# EAGLE board ovm7962 (EAGLE 8.5.0)
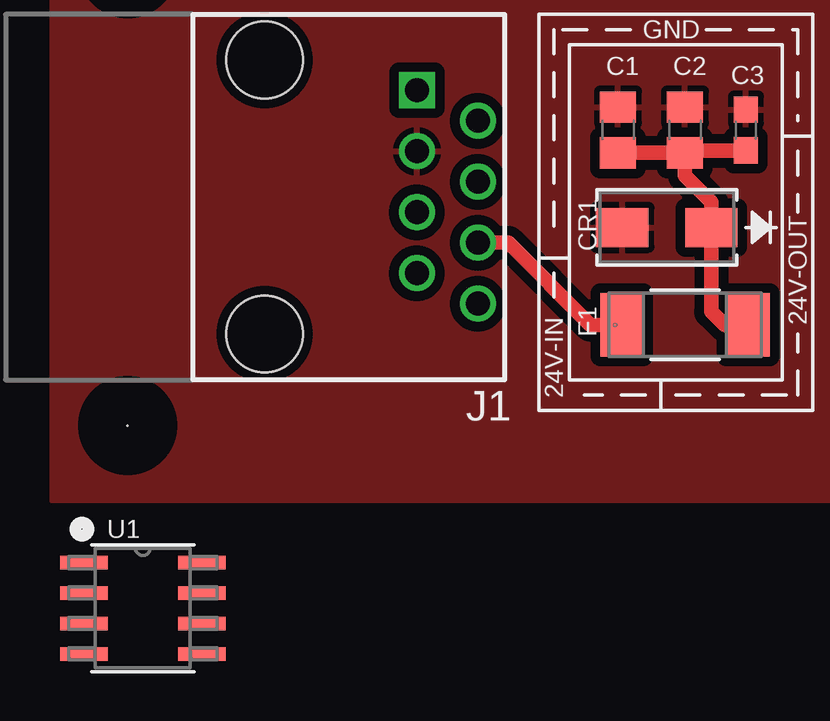
[diagram p0: board, top side]
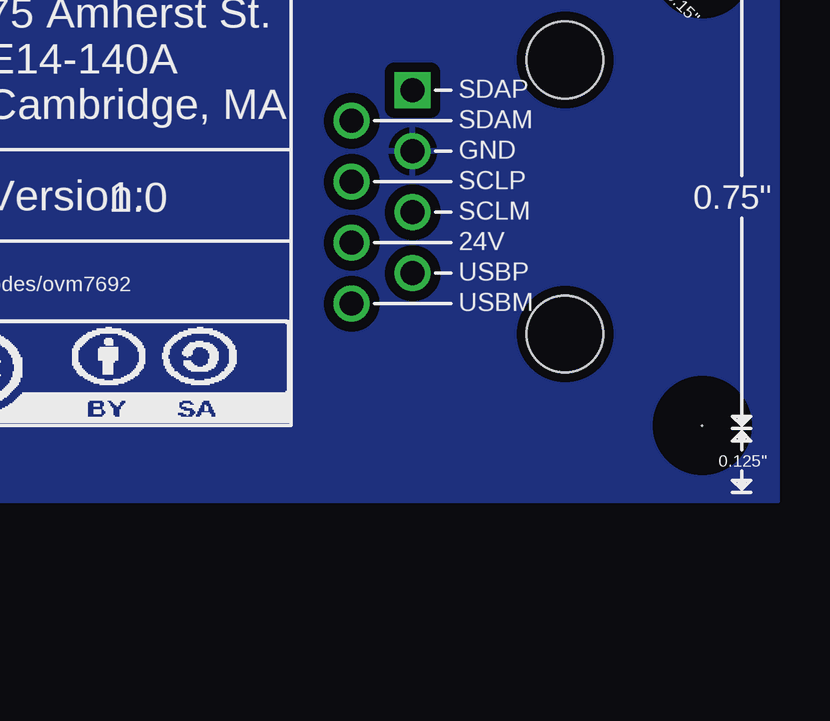
[diagram p1: board, bottom side, seen from below]

No outline drawn. Coordinates in mm, seen from the top.
Copper layers (1*16): Top 0.035559375mm / dielectric 1.6mm / Bottom 0.035559375mm
Design rules "oshpark-2layer": minimum track width 6mil, minimum drill 10mil, track to track 6mil, track to pad 6mil, pad to pad 6mil, via to via 6mil, smd to smd 6mil, copper to edge 15mil, drill to drill 6mil, minimum pad ring 5mil, minimum via ring 5mil, stop-mask expansion 2.5mil, vias tented up to drill 0mil, thermal gap 10mil
Holes 0 mm at 3.17,3.17 3.17,22.23 60.33,22.23 60.33,3.17
tRestrict: area 1.5,20.6 to 4.8,23.9; area 1.5,1.5 to 4.8,4.8; area 58.7,20.6 to 62,23.9; area 58.7,1.5 to 62,4.8
bRestrict: area 1.5,20.6 to 4.8,23.9; area 1.5,1.5 to 4.8,4.8; area 58.7,20.6 to 62,23.9; area 58.7,1.5 to 62,4.8

## Footprints (pad centres in the part's own frame; a part is rotated, then mirrored left to right if it is on the bottom)
C0805 = smd 1.3 x 1.5: 1 -0.95,0; 2 0.95,0
C0603 = smd 1.1 x 1: 1 -0.85,0; 2 0.85,0
SMA = smd 2.18 x 1.63: 1 -1.857,0; 2 1.857,0
SS = smd 1.803 x 2.642: 1 -2.629,0; 2 2.629,0
OPENAG-V1-RJ45 = drill 1: 24V(6) 1.905,8.89; DSCLM(5) 0.635,6.35; DSCLP(4) -0.635,8.89; DSDAM(2) -3.175,8.89; GND(3) -1.905,6.35; USBM(8) 4.445,8.89; USBP(7) 3.175,6.35 | drill 1 square: DSDAP(1) -4.445,6.35 | hole 3.2: -5.715,0; 5.715,0
M08A = smd 1.981 x 0.559: 1 -2.464,1.905; 2 -2.464,0.635; 3 -2.464,-0.635; 4 -2.464,-1.905; 5 2.464,-1.905; 6 2.464,-0.635; 7 2.464,0.635; 8 2.464,1.905

## Placement (x,y rotation side)
C1  10uF  [C0805]  23.62,15.49 90 top
C2  4.7uF  [C0805]  26.42,15.49 90 top
C3  0.1uF  [C0603]  28.96,15.49 90 top
CR1  SMAJ26A-13-F  [SMA]  25.65,11.43 180 top
F1  SST 7  [SS]  26.42,7.37 0 top
FRAME1  [DOCFIELD]  58.42,3.17 0 bottom
J1  54602-908LF  [OPENAG-V1-RJ45]  8.89,12.7 270 top
U1  LM2674MX-5.0/NOPB  [M08A]  3.81,-4.45 0 top
U$2  [OPENAG-LOGO-750-MIL]  38.1,1.27 0 top

## Library data of the parts
C1-C3 = openag-capacitors; POPULATE: YES; VERIFIED: NO
CR1 = openag-diodes; POPULATE: YES; VERIFIED: NO
F1 = openag-fuses; POPULATE: YES; VERIFIED: NO
FRAME1 = openag-frames; AUTHOR: JR; TITLE: OVM7692 Sensor Node; URL: github.com/OpenAgInitiative/openag_eagle/proj/nodes/ovm7692; VER: 1.0
J1 = openag-connectors; POPULATE: YES; VERIFIED: NO
U1 = openag-regulators; POPULATE: YES; VERIFIED: NO
U$2 = openag-frames

## Nets
24V_IN: F1.1 J1.24V(6)
+24V: C1.1 C2.1 C3.1 CR1.1 F1.2
GND: C1.2 C2.2 C3.2 CR1.2 J1.GND(3)

## Tracks (layer width: path | path; a pad name or v marks a point on that pad's centre or on a via)
24V_IN
  Top 0.61: J1.24V(6) 19.05,10.79 22.48,7.37 F1.1
+24V
  Top 0.61: C1.1 C2.1 | C2.1 26.42,14.64 C3.1 | C2.1 26.42,13.59 27.51,12.49 CR1.1 27.51,7.92 28.07,7.37 F1.2
GND
  pour Top (isolate 0.406): 0,25.4 63.5,25.4 63.5,0 0,0
  pour Bottom (isolate 0.406): 63.5,25.4 63.5,0 0,0 0,25.4

## Text on the board
tPlace: OVM7692 Camera Sensor Node | GND | 24V-OUT | 24V-IN
bPlace: 2.25" | 0.125" | d=0.15" | 0.75" | 0.125"